# Altium PCB PCB-MAKEY_MAKEY_PTITTEAM_v1.3.PcbDoc
Units mil, origin at the board's own origin, x right, y up, seen from the top; angles counter-clockwise.
Board outline 3500 x 1950 mil, 2 copper layers (Top Layer, Bottom Layer); 48 components, 59 nets, 150 pads, 39 vias.
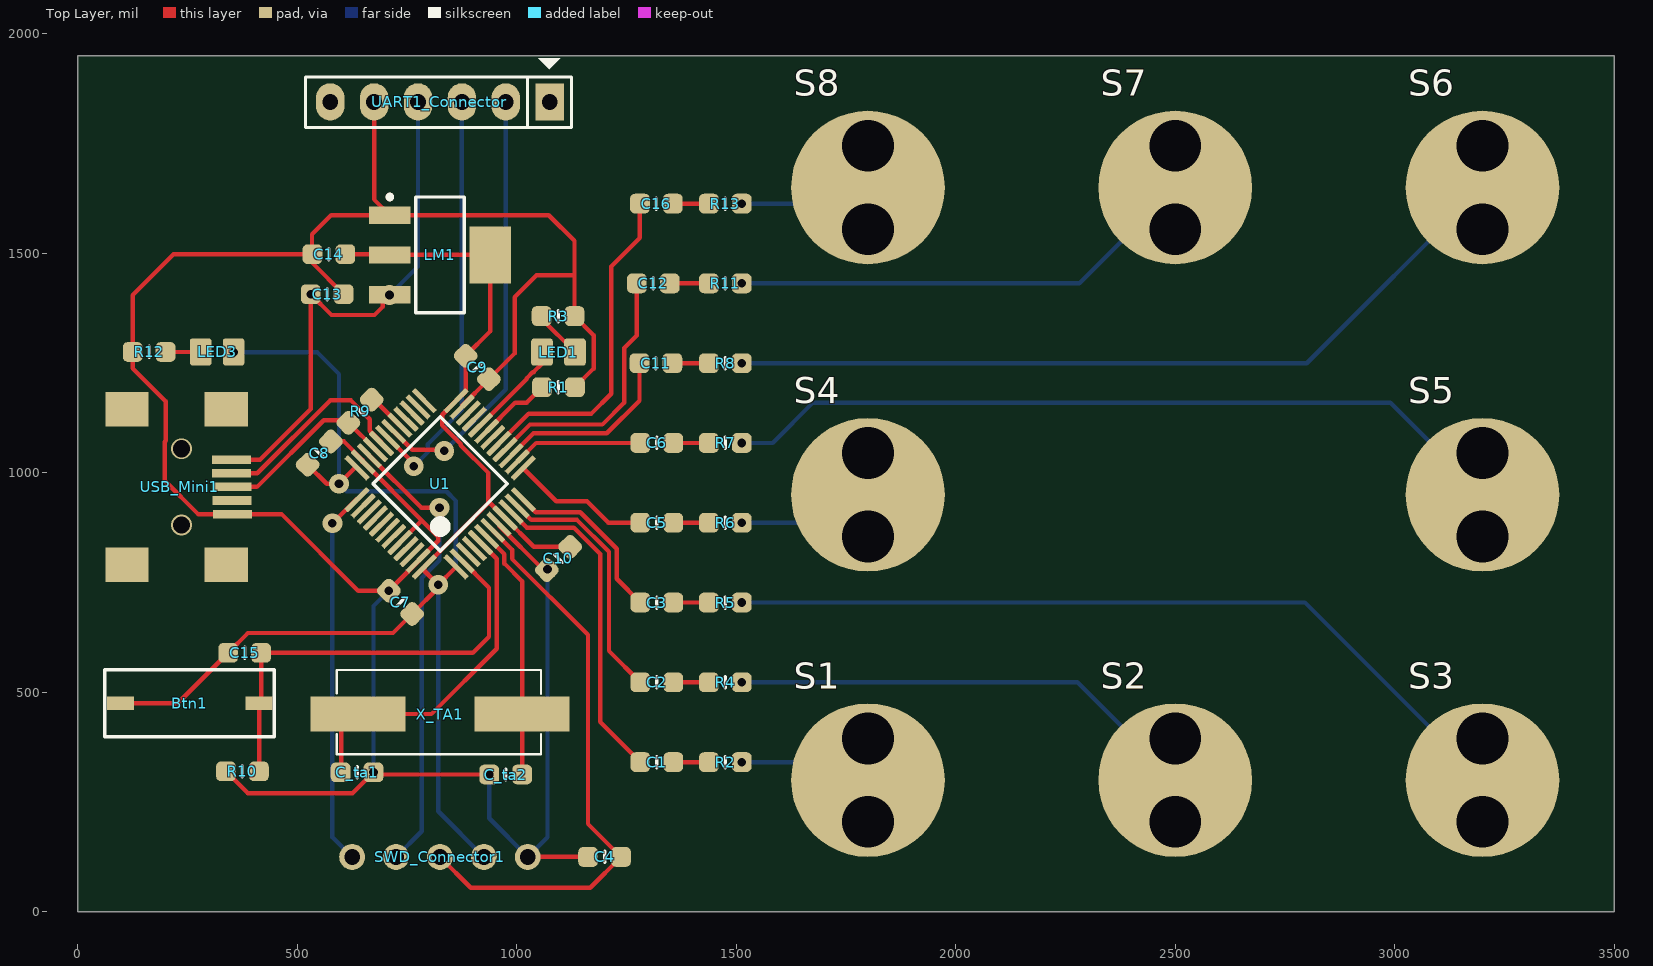
[diagram p0: Top Layer view]
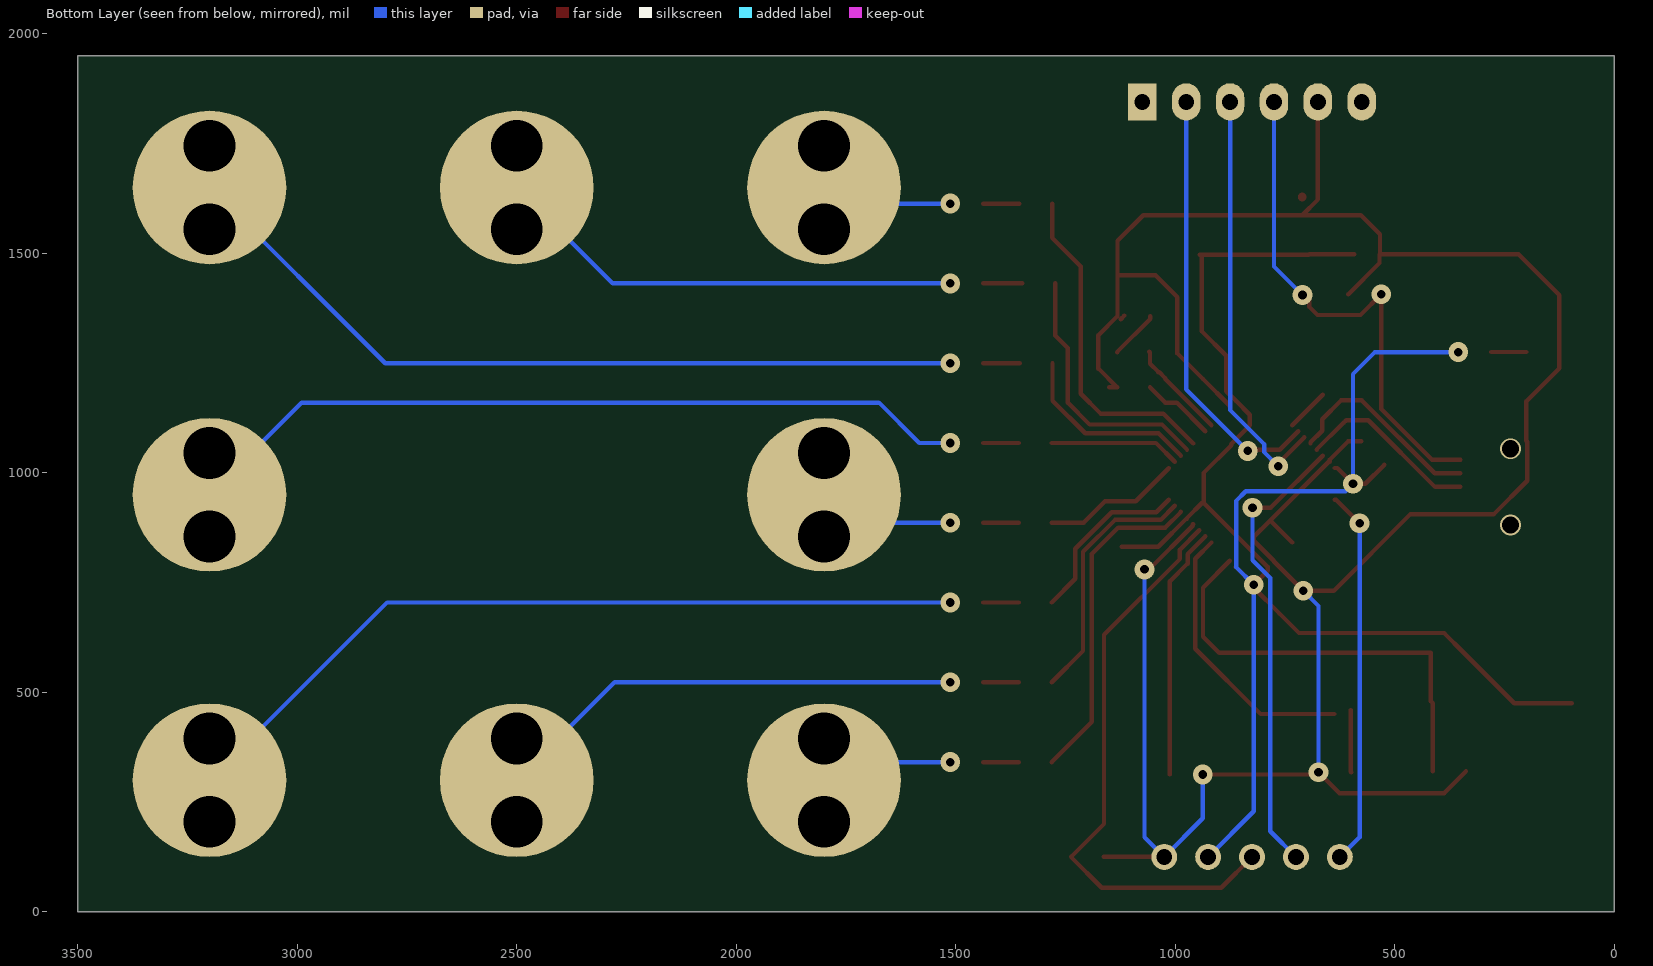
[diagram p1: Bottom Layer view, seen from below]

## Layer stack, top to bottom
Top Solder: solder mask 0.4, Solder Resist, Dk 3.5
Top Layer: signal copper 1.4
Dielectric1: dielectric 12.6, FR-4, Dk 4.8
Bottom Layer: signal copper 1.4
Bottom Solder: solder mask 0.4, Solder Resist, Dk 3.5

## Board outline
0,1950 0,0 3500,0 3500,1950 0,1950

## Design rules (kind name [scope] priority, off if disabled: settings)
Clearance [All] p1: gap=10 except(7: Arc-Arc Arc-SMDPad Track-SMDPad SMDPad-SMDPad; 7.5: Arc-Track Track-Track)
PolygonConnect [All] p1: connectstyle=Relief reliefconductorwidth=10 reliefentries=4 polygonreliefangle="90 Angle" airgapwidth=10
RoutingVias [All] p1: holewidth=28 width=50 viastyle="Through Hole" minholewidth=28 minwidth=50 maxholewidth=28 maxwidth=50
SolderMaskExpansion [All] p1: expansion=4
Width [All] p1: maxlimit=10 minlimit=10 preferedwidth=10
30 further rules are at their usual default settings.

## Components (designator, comment, footprint, x,y, rotation, side; value= is the part's Value field where it differs from the comment)
Btn1 "Function" Button_SMD_2pin 255,475 r180 top
C1 "104" CAP-0603 1319,341.05 r0 top
C2 "104" CAP-0603 1319,522.81 r0 top
C3 "104" CAP-0603 1319,704.57 r0 top
C4 "104" CAP-0603 1200,125 r180 top
C5 "104" CAP-0603 1319,886.33 r0 top
C6 "104" CAP-0603 1319,1068.09 r0 top
C7 "1uF" CAP-0603 735,705 r315 top
C8 "1uF" CAP-0603 550,1045 r45 top
C9 "1uF" CAP-0603 910,1240 r135 top
C10 "1uF" CAP-0603 1095,805 r225 top
C11 "104" CAP-0603 1317,1249.85 r0 top
C12 "104" CAP-0603 1311,1431.61 r0 top
C13 "104" CAP-0603 568,1407 r180 top
C14 "104" CAP-0603 572,1498 r0 top
C15 "104" CAP-0603 380,590 r180 top
C16 "104" CAP-0603 1318,1613.37 r0 top
C_ta1 "22pF" CAP-0603 636.13,317.78 r0 top
C_ta2 "22pF" CAP-0603 974.68,312.76 r180 top
LED1 "color" LED-0805 1095,1275 r0 top
LED3 "color" LED-0805 317.44,1275.35 r180 top
LM1 "LM1117" SOT223-4N 825,1496.49 r0 top
R1 "0R" RES-0603 1095,1195 r180 top
R2 "0R" RES-0603 1475,341.05 r0 top
R3 "1k2" RES-0603 1094.04,1357.16 r180 top
R4 "0R" RES-0603 1475,522.81 r0 top
R5 "0R" RES-0603 1475,704.57 r0 top
R6 "0R" RES-0603 1475,886.33 r0 top
R7 "0R" RES-0603 1475,1068.09 r0 top
R8 "0R" RES-0603 1475,1249.85 r0 top
R9 "1k5" RES-0603 642.9,1140.27 r45 top
R10 "10k" RES-0603 375,320 r0 top
R11 "0R" RES-0603 1475,1431.61 r0 top
R12 "1k2" RES-0603 162.44,1275.35 r0 top
R13 "0R" RES-0603 1475,1613.37 r0 top
S1 "C_Sensor" SOP2 1800,300 r0 top
S2 "C_Sensor" SOP2 2500,300 r0 top
S3 "C_Sensor" SOP2 3200,300 r0 top
S4 "C_Sensor" SOP2 1800,950 r0 top
S5 "C_Sensor" SOP2 3200,950 r0 top
S6 "C_Sensor" SOP2 3200,1650 r0 top
S7 "C_Sensor" SOP2 2500,1650 r0 top
S8 "C_Sensor" SOP2 1800,1650 r0 top
SWD_Connector1 "" JP_5 825,125 r0 top
U1 "STM32F103C8T6" LQFP48_N 825.51,974.94 r135 top
UART1_Connector "Connector" JP6 1075,1845 r180 top
USB_Mini1 "" Micro_USB 350,1030 r270 top
X_TA1 "8Mhz" Xtal_SMD 825.08,450.55 r180 top

## Footprints (in the part's own frame and the unit in brackets; to place one, negate y for a bottom-side part, rotate by r counter-clockwise, add the part's x,y. Pads: shape width x height; smd on the part's side, far side on the other; paste and mask are expansions set on the pad)
Button_SMD_2pin [mm] "Button smd 2pin"
  rect 1.55x0.8 smd: 1(-4.013,0) 2(4.013,0)
  silkscreen extent -4.9,-1.93 4.93,1.93, body extent -4.05,-1.8 3.95,1.8, height 2.53
CAP-0603 [mil] "Chip Capacitor; Body 2 x 1.2 mm (LxW typ)"
  rrect50% 45x45 smd: 1(-37.5,0) 2(37.5,0)
  silkscreen extent 0,-12 0,12, body extent -39,-24 39,24, height 28
JP6 [mil] "JP6"
  rect 65x85 hole 36: 1(0,0)
  oval 65x85 hole 36: 2(100,0) 3(200,0) 4(300,0) 5(400,0) 6(500,0)
  silkscreen extent -50,-99 556,58, body extent -48,-50 548,48, height 323
JP_5 [mm]
  round 1.5 hole 0.914: 1(-5.08,0) 2(-2.54,0) 3(0,0) 4(2.54,0) 5(5.08,0)
  body extent -6.3,-1.36 6.3,1.14, height 8.22
LED-0805 [mil] "Chip LED; Body 2 x 1.2 mm (LxW typ)"
  rrect25% 49.27x61.77 smd: 1(-37.5,0) 2(37.5,0)
  body extent -39,-25 39,25, height 31
LQFP48_N [mm] "Thin QFP, 48-Leads, Body 7x7mm, Pitch 0.5mm, IPC Medium Density"
  rrect25% 1.8x0.297 smd: 1(-4.05,2.75) 2(-4.05,2.25) 3(-4.05,1.75) 4(-4.05,1.25) 5(-4.05,0.75) 6(-4.05,0.25) 7(-4.05,-0.25) 8(-4.05,-0.75) 9(-4.05,-1.25) 10(-4.05,-1.75) 11(-4.05,-2.25) 12(-4.05,-2.75) 25(4.05,-2.75) 26(4.05,-2.25) 27(4.05,-1.75) 28(4.05,-1.25) 29(4.05,-0.75) 30(4.05,-0.25) 31(4.05,0.25) 32(4.05,0.75) 33(4.05,1.25) 34(4.05,1.75) 35(4.05,2.25) 36(4.05,2.75)
  rrect25% 0.297x1.8 smd: 13(-2.75,-4.05) 14(-2.25,-4.05) 15(-1.75,-4.05) 16(-1.25,-4.05) 17(-0.75,-4.05) 18(-0.25,-4.05) 19(0.25,-4.05) 20(0.75,-4.05) 21(1.25,-4.05) 22(1.75,-4.05) 23(2.25,-4.05) 24(2.75,-4.05) 37(2.75,4.05) 38(2.25,4.05) 39(1.75,4.05) 40(1.25,4.05) 41(0.75,4.05) 42(0.25,4.05) 43(-0.25,4.05) 44(-0.75,4.05) 45(-1.25,4.05) 46(-1.75,4.05) 47(-2.25,4.05) 48(-2.75,4.05)
  silkscreen extent -2.75,-2.75 2.75,2.75, body extent -3.5,-3.5 3.5,3.5, height 1.6
Micro_USB [mm] "Micro usb connector"
  rect 2x2.5 smd: 0(-2.929,-6.045) 0(-2.925,-0.305) 0(6.071,-6.045) 0(6.075,-0.305)
  rect 0.5x2.25 smd: 1(0,0) 2(0.787,0.013) 3(1.575,0.025) 4(2.362,0.038) 5(3.15,0.051)
  body extent -3.78,-8.83 6.92,0.37, height 3.95
RES-0603 [mil] "Chip Resistor; Body 2 x 1.2 mm (LxW typ)"
  rrect50% 45x45 smd: 1(-37.5,0) 2(37.5,0)
  silkscreen extent 0,-12 0,12, body extent -39,-24 39,24, height 28
SOP2 [mil]
  round 350 all layers, no hole: 1(0,0)
SOT223-4N [mm]
  rect 2.4x1 smd: 1(-2.9,2.3) 2(-2.9,0) 3(-2.9,-2.3)
  rect 2.4x3.3 smd: 4(2.9,0)
  Top Layer circle w0.25: c-2.9,3.35 r0.125
  silkscreen extent -3.02,-3.35 1.4,3.47, body extent -3.39,-3.27 3.5,3.23, height 1.72
Xtal_SMD [mm] "Crystal smd"
  rect 5.5x2 smd: 1(-4.75,0) 2(4.75,0)
  silkscreen extent -5.84,-2.54 5.97,2.32, body extent -6.3,-2.51 6.5,2.32, height 4.3

## Part data
Btn1: library part Button_SMD_2pin, "Switch button 2 pin"
C1 C2 C3 C4 C5 C6 C9 C10 C11 C13 C14 C15: library part CM, "Cap SMD"
C7 C8 C12 C16 C_ta1 C_ta2: library part CN0, "Cremic For Xtal 1pF => 100pF"
LED1 LED3: library part Led_SMD, "Led smd"
LM1: "3v3"
R1 R2 R3 R4 R5 R6 R7 R8 R10 R11 R12 R13: library part Res_SMD_0603, "Resistor smd 0603 type"
R9: library part R, "Resistor 1/4W"
SWD_Connector1: library part Load_Program
U1: "STM32 ARM-based 32-bit MCU with 64 Kbytes Flash, 48-pin LQFP, Industrial Temperature"
UART1_Connector: library part USB2Com_Conn, "Connector to USB2Com module"
USB_Mini1: library part USB_M
X_TA1: library part XT2, "Crystal For all Crystal 2pin."

## Via types
v1: diameter 45, hole 19.68, Top Layer to Bottom Layer, 21 vias
v2: diameter 130, hole 118.11, Top Layer to Bottom Layer, 16 vias
v3: diameter 47.24, hole 39.37, Top Layer to Bottom Layer, tented both sides, 2 vias

## Nets (pads, with @x,y where several pads share a name; then routed paths per layer and width w, separated by ;. In a path a pad name is that pad's centre, name@x,y a point inside that pad or via, vN(x,y) a via of type N, cw(c..) or ccw(c..) an arc to the next point about the centre after c; other vN are vias at no path point)
GND: C4.2 C7.1 C8.2 C9.1 C10.2 C13.1 C14.1 C_ta1.2 C_ta2.2 LM1.1 R1.1 R3.1 R10.1 R12.1 SWD_Connector1.5 U1.8 U1.23 U1.35 U1.44 U1.47 UART1_Connector.5 USB_Mini1.5 | length 6290.4
  Top Layer w10: R10.1 387.5,270 625.85,270 v1(673.63,317.78) 678.65,312.76 v1(937.18,312.76) ; C8.2 606.27,1071.52 647.52,1030.26 647.52,1025.05 U1.35 783.77,891.41 ; C13.1 534.5,1478 C14.1 ; UART1_Connector.5 675,1622.87 LM1.1 ; U1.44 783.73,891.41 ; U1.23 875.62,1152.59 C9.1 995,1271.97 995,1400 1045,1450 1131.54,1450 ; U1.8@959.14,882.83 U1.8 960.21,883.08 960.21,879.4 1061.12,778.48 C10.2 ; SWD_Connector1.5 C4.2 ; R3.1@1115.67,1358.36 R3.1@1124.21,1349.83 ; R1.1@1150,1195 R1.1 1175,1237.5 1175,1313.7 R3.1 1131.54,1450 ; C14.1 218,1498 124.94,1404.94 R12.1 124.94,1237.94 200,1162.88 200,1072.81 197.8,1070.61 197.8,982.2 274,906 USB_Mini1.5 464,906 638.48,731.52 v1(708.48,731.52) 775.4,798.43 U1.47 821.07,845.23 821.07,854.11 783.77,891.41 ; C14.1 533.48,1499.02 533.48,1543.48 577.04,1587.04 LM1.1 ; LM1.1 1072.96,1587.04 1131.54,1528.46 1131.54,1450
  Bottom Layer w10: v1(673.63,317.78) 673.63,696.66 v1(708.48,731.52) ; v1(937.18,312.76) 937.18,212.82 SWD_Connector1.5 1070,170 v1(1070,780)
NetC1_2: C1.2 R2.1 | length 81
  Top Layer w10: C1.2 R2.1
NetC2_2: C2.2 R4.1 | length 81
  Top Layer w10: C2.2 R4.1
NetC3_2: C3.2 R5.1 | length 81
  Top Layer w10: C3.2 R5.1
NetC5_2: C5.2 R6.1 | length 81
  Top Layer w10: C5.2 R6.1
NetC6_2: C6.2 R7.1 | length 81
  Top Layer w10: C6.2 R7.1
NetC11_2: C11.2 R8.1 | length 83
  Top Layer w10: C11.2 R8.1
NetC12_2: C12.2 R11.1 | length 89
  Top Layer w10: C12.2 R11.1
NetC16_2: C16.2 R13.1 | length 82
  Top Layer w10: C16.2 R13.1
NetLED1_2: LED1.2 R3.2 | length 113.6
  Top Layer w10: R3.2 1056.54,1350.96 LED1.2
NetLED3_2: LED3.2 R12.2 | length 80
  Top Layer w10: R12.2 LED3.2
NetR2_2: R2.2 S1.1 | length 304.5
  Bottom Layer w10: v1(1512.5,341.05) 1758.95,341.05 S1.1
  other v2: 1800,205 1800,395
NetR4_2: R4.2 S2.1 | length 1079.8
  Bottom Layer w10: v1(1512.5,522.81) 2277.19,522.81 S2.1
  other v2: 2500,205 2500,395
NetR5_2: R5.2 S3.1 | length 1855.1
  Bottom Layer w10: v1(1512.5,704.57) 2795.43,704.57 S3.1
  other v2: 3200,205 3200,395
NetR6_2: R6.2 S4.1 | length 313.9
  Bottom Layer w10: v1(1512.5,886.33) 1736.33,886.33 S4.1
  other v2: 1800,855 1800,1045
NetR7_2: R7.2 S5.1 | length 1812.6
  Bottom Layer w10: v1(1512.5,1068.09) 1583.09,1068.09 1675,1160 2990,1160 S5.1
  other v2: 3200,855 3200,1045
NetR8_2: R8.2 S6.1 | length 1853.2
  Bottom Layer w10: v1(1512.5,1249.85) 2799.85,1249.85 S6.1
  other v2: 3200,1555 3200,1745
NetR11_2: R11.2 S7.1 | length 1078
  Bottom Layer w10: v1(1512.5,1431.61) 2281.61,1431.61 S7.1
  other v2: 2500,1555 2500,1745
NetR13_2: R13.2 S8.1 | length 302.7
  Bottom Layer w10: v1(1512.5,1613.37) 1763.37,1613.37 S8.1
  other v2: 1800,1555 1800,1745
NRST: C4.1 SWD_Connector1.3 U1.7 | length 1335.7
  Top Layer w10: SWD_Connector1.3 895,55 1167.5,55 C4.1 1162.25,200.25 1162.25,630.93 989.32,803.85 989.32,825.05 U1.7
OSC_IN: C_ta1.1 U1.5 X_TA1.2 | length 777.6
  Top Layer w10: C_ta1.1 599.99,319.13 X_TA1.2@599.99,459.62 ; X_TA1.2 805.55,450.55 954.32,599.32 954.32,804.37 U1.5
OSC_OUT: C_ta2.1 U1.6 X_TA1.1 | length 575.8
  Top Layer w10: U1.6 971.82,814.71 971.82,793.18 1012.09,752.91 C_ta2.1@1012.09,312.85
PA0: C1.1 U1.10 | length 754.6
  Top Layer w10: U1.10 1022.69,875.2 1129.8,875.2 1190,815 1190,432.55 C1.1
PA1: C2.1 U1.11 | length 579.3
  Top Layer w10: U1.11 1033.03,892.7 1137.3,892.7 1210,820 1210,594.31 C2.1
PA2: C3.1 U1.12 | length 403.9
  Top Layer w10: U1.12 1043.37,910.2 1144.55,910.2 1227.5,827.25 1227.5,758.57 C3.1
PA3: C5.1 U1.13 | length 318.9
  Top Layer w10: U1.13 1014.82,1010.18 1090,935 1160,935 1208.67,886.33 C5.1
PA4: C6.1 U1.14 | length 298.4
  Top Layer w10: U1.14 1043.93,1068.09 C6.1
PA5: C11.1 U1.15 | length 429.9
  Top Layer w10: U1.15 1038,1090 1205,1090 1279.5,1164.5 C11.1
PA6: C12.1 U1.16 | length 599.7
  Top Layer w10: U1.16 1030.16,1110 1195,1110 1245,1160 1245,1284.35 1273.5,1312.85 C12.1
PA7: C16.1 U1.17 | length 763.2
  Top Layer w10: U1.17 1027.33,1135 1170,1135 1215,1180 1215,1470 1280.5,1535.5 C16.1
PA13: SWD_Connector1.2 U1.34 | length 1045.2
  Top Layer w10: U1.34 782.67,920.35 v1(823.85,920.35)
  Bottom Layer w10: SWD_Connector1.2 783.57,183.57 783.57,760.49 823.85,800.78 v1(823.85,920.35)
PA14: SWD_Connector1.1 U1.37 | length 857.1
  Top Layer w10: v1(580,885) 633.75,938.75 U1.37
  Bottom Layer w10: v1(580,885) 580,170 SWD_Connector1.1
PA15: U1.38
PB0: U1.18
PB1: R1.2 U1.19 | length 167.8
  Top Layer w10: U1.19 996.65,1160 1022.5,1160 R1.2
PB2: LED1.1 U1.20 | length 227.8
  Top Layer w10: U1.20 1023,1214.19 1023,1215.88 1036.62,1229.5 1038.31,1229.5 1057.5,1248.69 LED1.1@1057.5,1274.09 ; LED1.1 LED1.1@1057.5,1274.09 ; LED1.1@1059.18,1275.77 LED1.1@1057.5,1274.09
PB3: U1.39
PB4: U1.40
PB5: U1.41
PB6: U1.42
PB7: U1.43
PB8: U1.45
PB9: U1.46
PB10: U1.21
PB11: U1.22
PB12: U1.25
PB13: U1.26
PB14: U1.27
PB15: U1.28
PC13: Btn1.1 C15.1 R10.2 U1.2 | length 1004.5
  Top Layer w10: R10.2@413,320 Btn1.1 417.5,479.5 C15.1 900,590 936.82,626.82 936.82,738.36 U1.2
PC14: U1.3
PC15: U1.4
USART1_RX: U1.31 UART1_Connector.3 | length 978.6
  Top Layer w10: U1.31 771.54,1015 v1(765,1015)
  Bottom Layer w10: v1@767.5,1012.5 v1(765,1015) 797.5,1047.5 797.5,1065.53 875,1143.03 UART1_Connector.3
USART1_TX: U1.30 UART1_Connector.2 | length 986.8
  Top Layer w10: U1.30 761.87,1052.5 832.5,1052.5 v1(835,1050)
  Bottom Layer w10: v1(835,1050) 975,1190 UART1_Connector.2
USB_5V: C13.2 LM1.3 UART1_Connector.4 USB_Mini1.1 | length 1177
  Top Layer w10: USB_Mini1.1 415,1030 530.5,1145.5 v1(530.5,1407) 577.98,1359.52 675.85,1359.52 694.32,1377.98 LM1.3@694.32,1407.12
  Bottom Layer w10: v1(710,1405) 775,1470 UART1_Connector.4
USB_DISC: R9.2 U1.29 | length 98.4
  Top Layer w10: R9.2@664.15,1178.15 733.64,1108.66 U1.29
USBDM: U1.32 USB_Mini1.2 | length 467.6
  Top Layer w10: USB_Mini1.2 409,999 575,1165 622.41,1165 665.22,1122.19 665.22,1096.08 691.88,1069.42 U1.32
USBDP: R9.1 U1.33 USB_Mini1.3 | length 417.5
  Top Layer w10: USB_Mini1.3 408,968 560,1120 610.14,1120 R9.1 ; R9.1@616.74,1114.12 U1.33
VCC: Btn1.2 C7.2 C8.1 C9.2 C10.1 C14.2 C15.2 LED3.1 LM1.2 LM1.4 SWD_Connector1.4 U1.1 U1.9 U1.24 U1.36 U1.48 | length 4203.7
  Top Layer w10: Btn1.2 227.5,475 C15.2 387.5,635 718.03,635 C7.2 821.07,738.03 v1(821.07,744.96) ; C8.1 566.97,975 v1(595,975) 631.13,1011.13 U1.36 ; C14.2@592.3,1497.67 694.32,1497.67 695.49,1496.49 LM1.2 LM1.4@944.43,1496.49 ; U1.1 v1(821.07,744.96) ; LM1.4 939.17,1322.21 C9.2 883.48,1186.03 U1.24 830,1132.55 830,1108.03 872.5,1065.53 872.5,1062.5 935.32,999.68 935.32,931.64 ; U1.9@973.06,894.98 U1.9 ; C10.1 1038.54,831.52 U1.9 ; v1(821.07,744.96) 789.32,776.71 U1.48 825.32,821.64 825.7,821.64 825.51,821.83 935.32,931.64 ; 935.32,931.64 938.42,931.64 U1.9
  Bottom Layer w10: v1(355,1275) 545,1275 595,1225 v1(595,975) 612.15,957.85 839.38,957.85 861.35,935.88 861.35,785.25 v1(821.07,744.96) 821.07,228.93 SWD_Connector1.4
pads on no net: UART1_Connector.1 UART1_Connector.6 USB_Mini1.0 USB_Mini1.4
copper on no net:
  other v3: 236.43,881.39 236.43,1054.61

## Silkscreen, mask and mechanical layers (free items; w line width, h text height)
Mechanical 13:
  lines w10: 0,975 75,975 3500,975